# Altium PCB tara_aghaei.PcbDoc
Units mm, origin at the board's own origin, x right, y up, seen from the top; angles counter-clockwise.
Board outline 101.05 x 73 mm, 2 copper layers (Top Layer, Bottom Layer); 28 components, 23 nets, 119 pads, 13 vias.
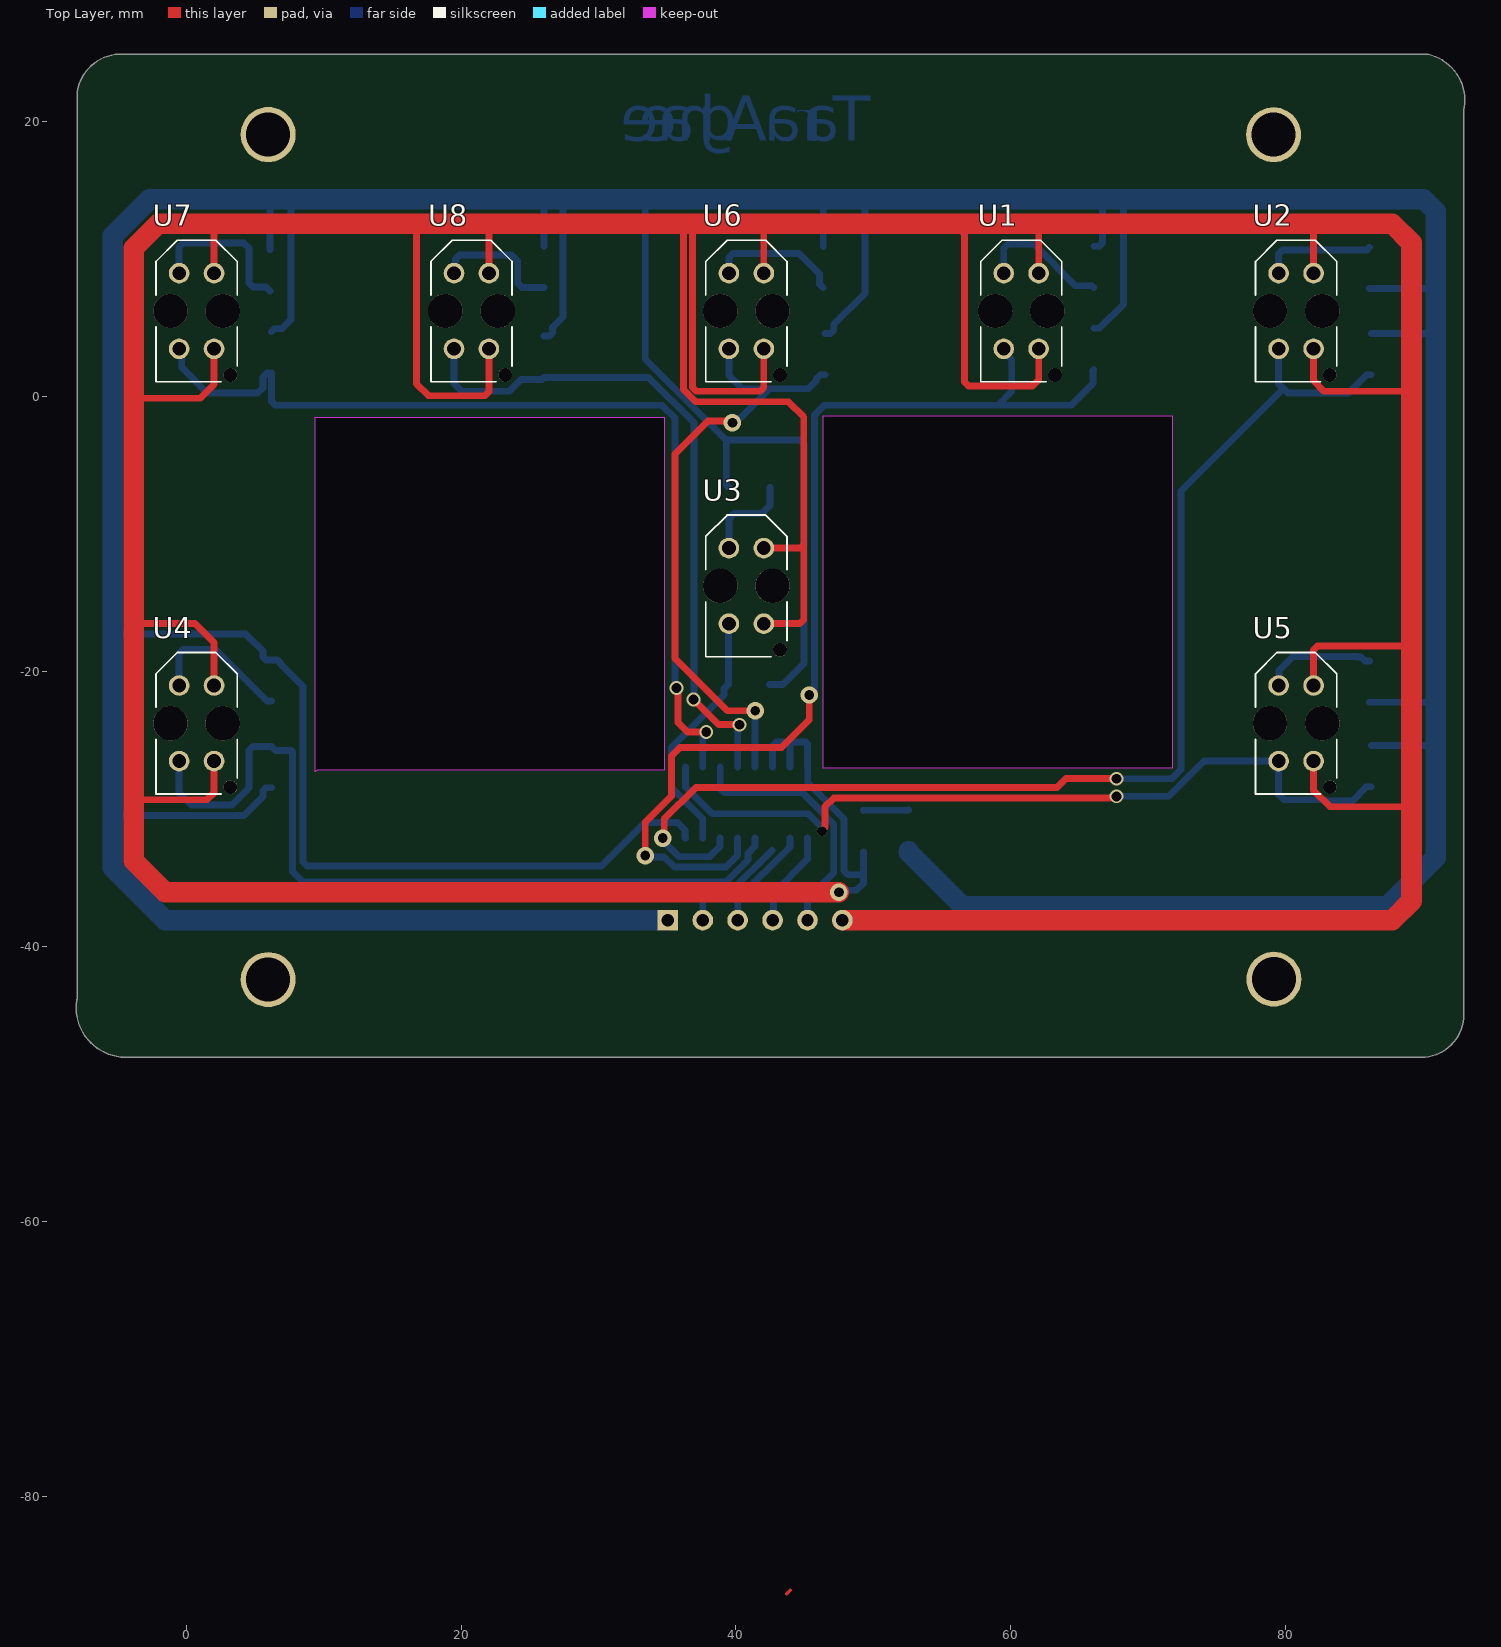
[diagram p0: Top Layer view]
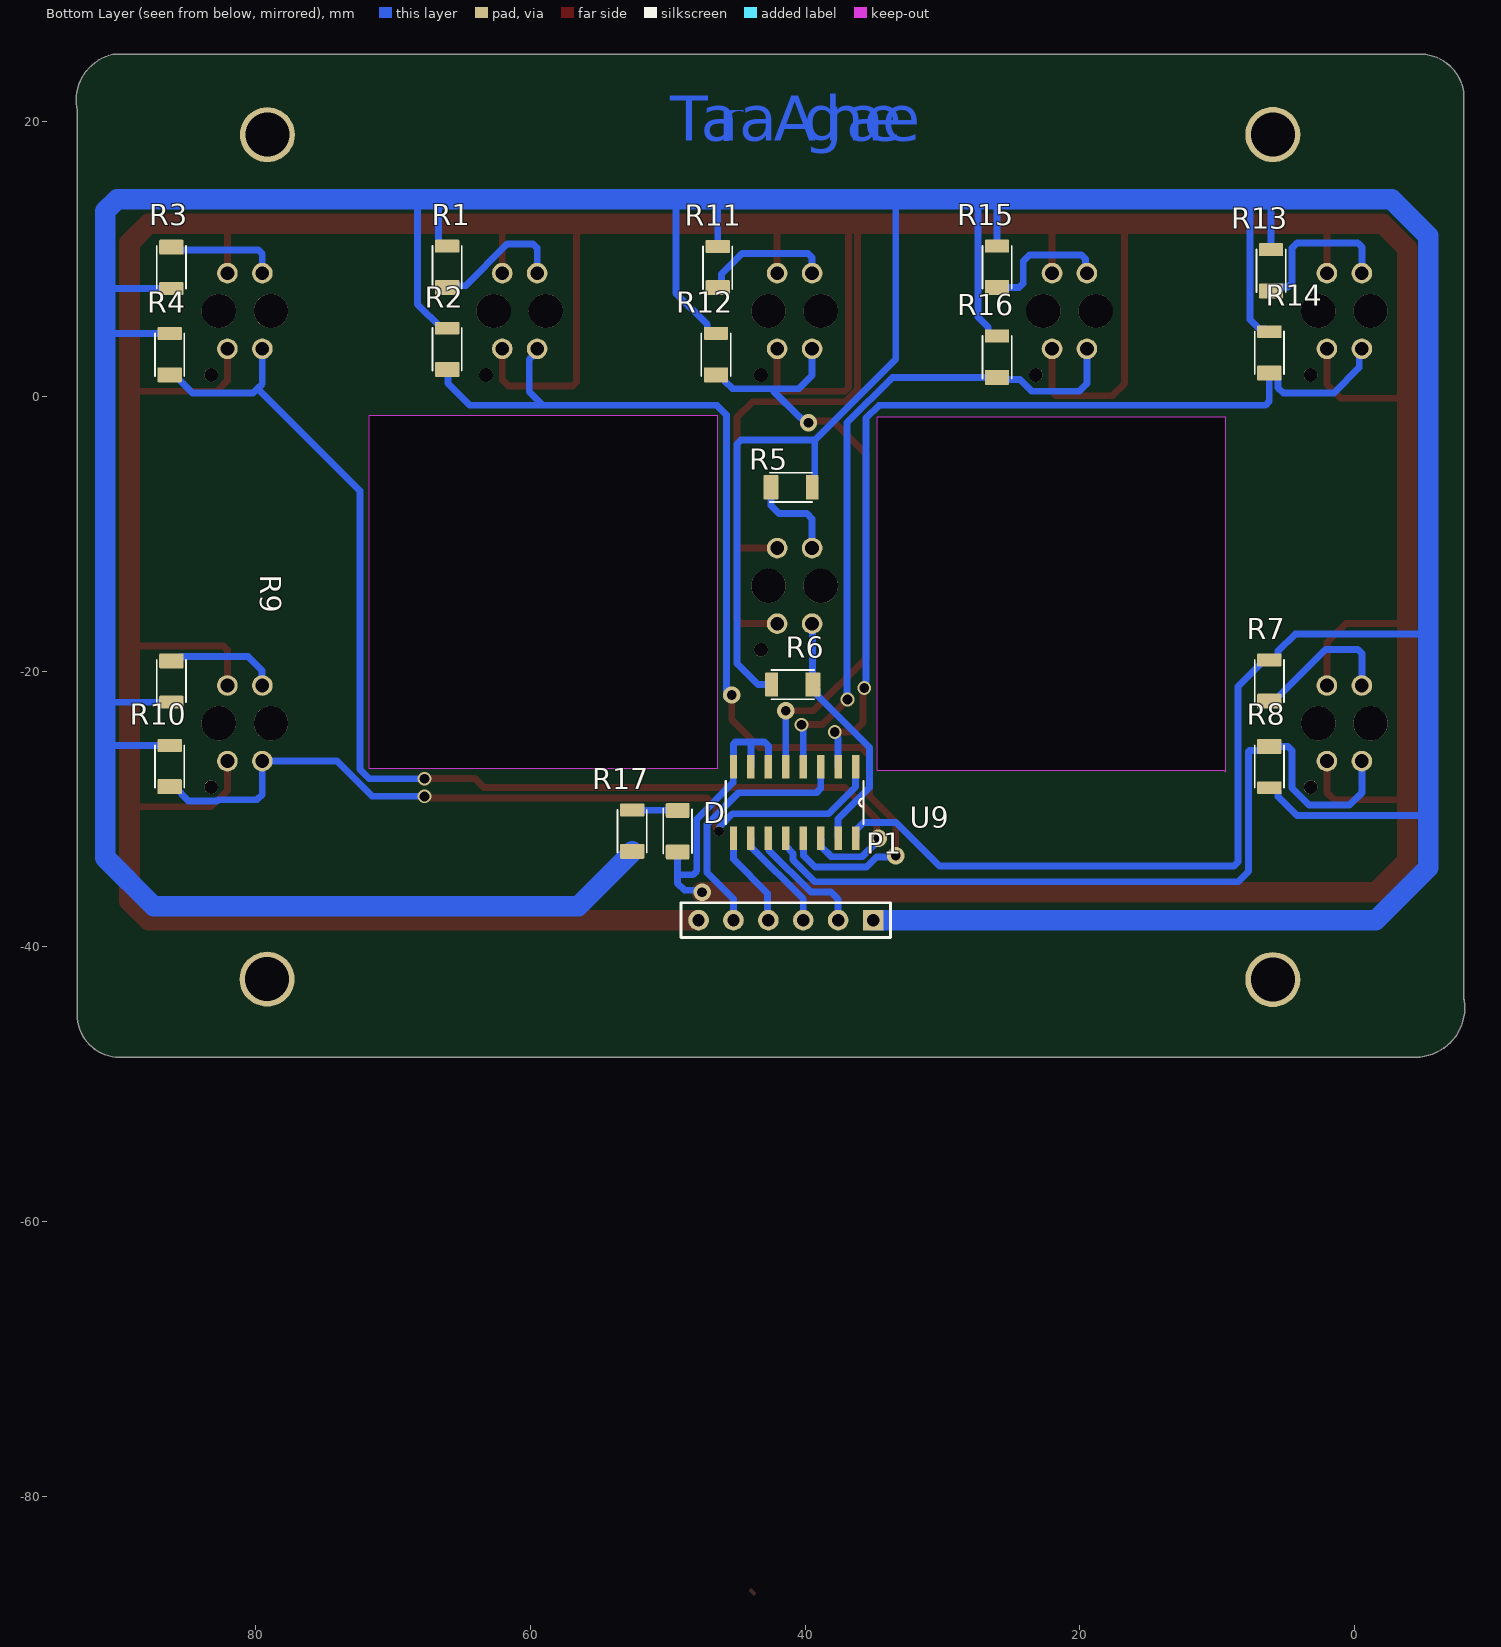
[diagram p1: Bottom Layer view, seen from below]
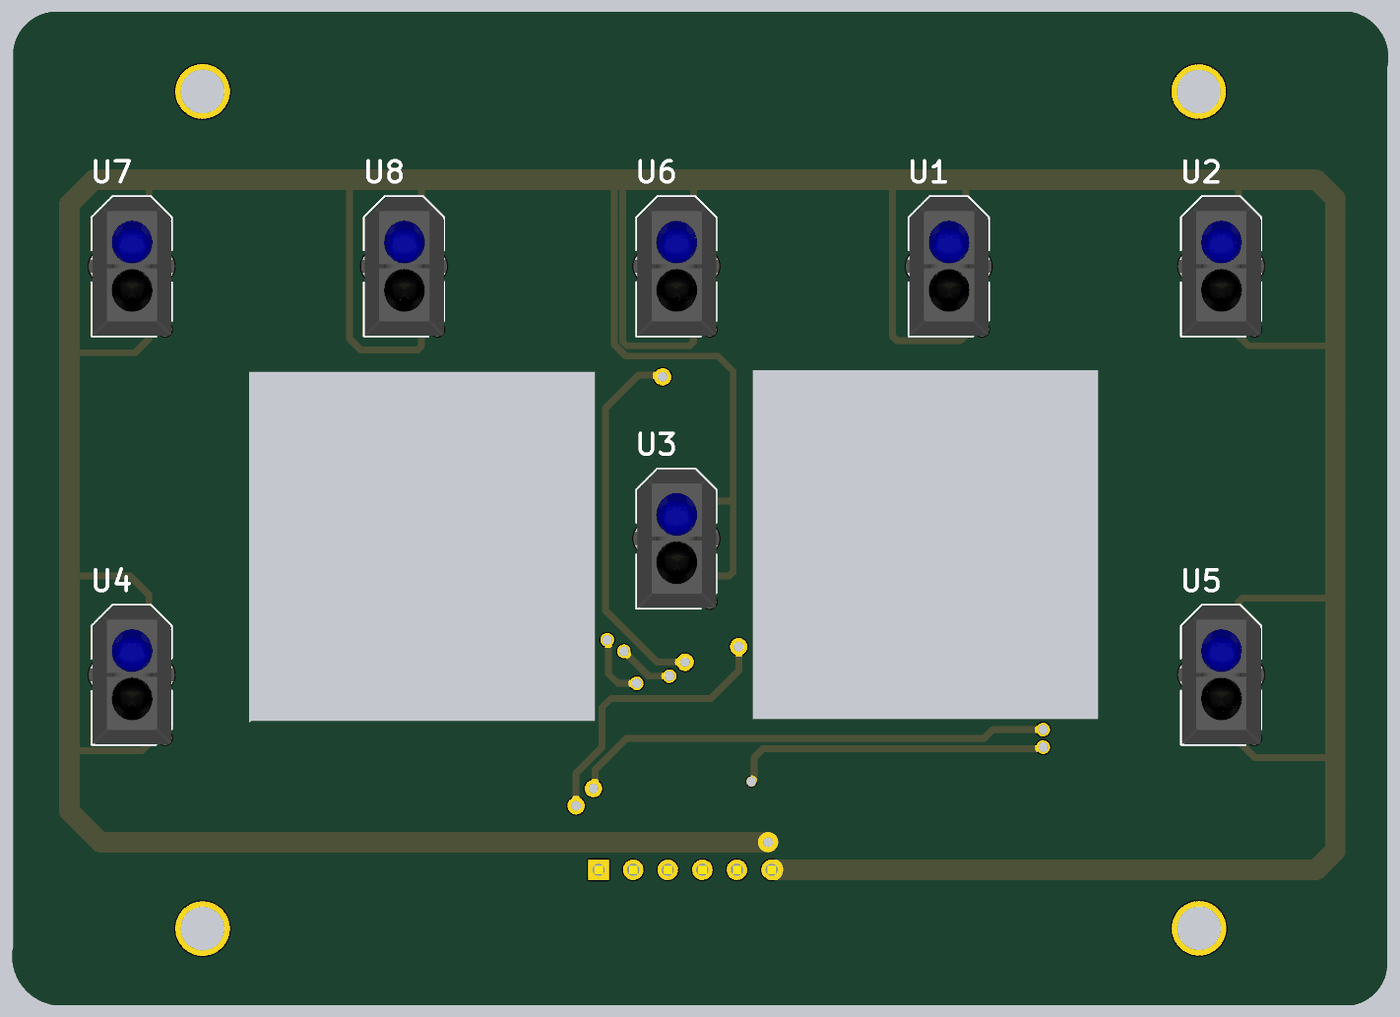
[diagram p2: 3D render of the assembled board from above, using the file's embedded part models]
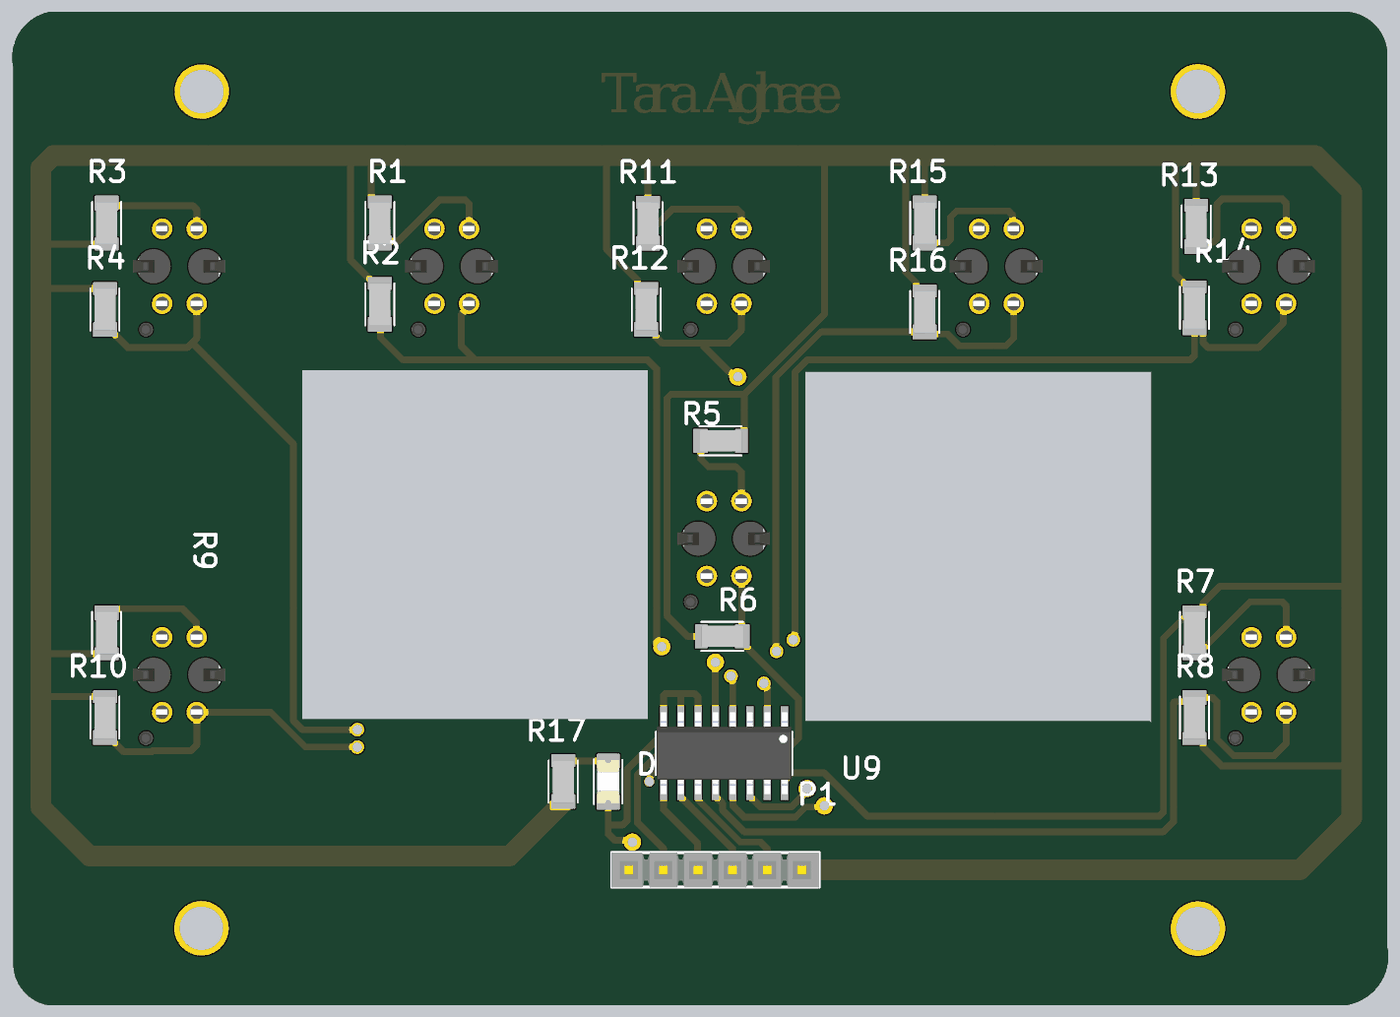
[diagram p3: 3D render of the assembled board from below, using the file's embedded part models]

## Layer stack, top to bottom
Top Solder: solder mask 0.0102, Solder Resist, Dk 3.5
Top Layer: signal copper 0.0356
Dielectric 1: dielectric 0.32, FR-4, Dk 4.8
Bottom Layer: signal copper 0.0356
Bottom Solder: solder mask 0.0102, Solder Resist, Dk 3.5

## Board outline
-4.757,-48.057 cw(c-4.37,-44.438) -7.974,-43.927 cw(c-7.848,-43.945) -7.923,-43.842 -7.923,7.541 -7.923,22.108 cw(c-7.795,22.108) -7.922,22.125 cw(c-4.727,21.696) -4.307,24.891 90.342,24.891 cw(c90.342,24.764) 90.369,24.888 cw(c89.632,21.559) 93.042,21.559 cw(c89.633,21.559) 92.964,20.836 92.964,6.805 92.964,-44.957 cw(c89.85,-44.973) 92.964,-44.973 cw(c89.849,-44.973) 89.865,-48.088 cw(c89.865,-47.565) 89.865,-48.088 -4.628,-48.088 cw(c-4.628,-47.961) -4.715,-48.054 cw(c-4.744,-47.93)
cut-out: 46.355,-1.397 71.755,-1.397 71.755,-27.051 46.355,-27.051
cut-out: 9.398,-1.524 34.798,-1.524 34.798,-27.178 9.525,-27.178 9.398,-27.305

## Design rules (kind name [scope] priority, off if disabled: settings)
Clearance [All] p1: gap=0.254 ignorepadtopadclearanceinfootprint=FALSE except(0: Arc-Hole Track-Hole SMDPad-Hole THPad-Hole Via-Hole Fill-Hole Poly-Hole Region-Hole Text-Hole)
PolygonConnect [All] p1: connectstyle=Relief reliefconductorwidth=0.254 reliefentries=4 polygonreliefangle="90 Angle" airgapwidth=0.254
RoutingVias [All] p1: holewidth=0.711 width=1.27 viastyle="Through Hole" minholewidth=0.711 minwidth=1.27 maxholewidth=0.711 maxwidth=1.27
SolderMaskExpansion [All] p1: expansion=0.102
Width [All] p1: maxlimit=2 minlimit=0.5 preferedwidth=1 minimp=50.000000 maximp=50.000000 favimp=50.000000
30 further rules are at their usual default settings.

## Components (designator, comment, footprint, x,y, rotation, side; value= is the part's Value field where it differs from the comment)
D "LTST-C230KFKT" LEDC3216X110 49.276,-31.623 r270 bottom
P1 "Header 6" HDR1X6 35.052,-38.1 r0 bottom
R1 "4-1879462-2" RESC3115X65N 66.04,9.398 r90 bottom
R2 "4-1879462-2" RESC3115X65N 66.04,3.429 r90 bottom
R3 "4-1879462-2" RESC3115X65N 86.106,9.398 r270 bottom
R4 "4-1879462-2" RESC3115X65N 86.233,3.048 r90 bottom
R5 "4-1879462-2" RESC3115X65N 41.021,-6.604 r180 bottom
R6 "4-1879462-2" RESC3115X65N 40.894,-20.955 r0 bottom
R7 "4-1879462-2" RESC3115X65N 6.223,-20.701 r90 bottom
R8 "4-1879462-2" RESC3115X65N 6.223,-26.924 r270 bottom
R9 "4-1879462-2" RESC3115X65N 86.106,-20.701 r270 bottom
R10 "4-1879462-2" RESC3115X65N 86.233,-26.924 r90 bottom
R11 "4-1879462-2" RESC3115X65N 46.355,9.382 r90 bottom
R12 "4-1879462-2" RESC3115X65N 46.482,3.048 r90 bottom
R13 "4-1879462-2" RESC3115X65N 6.096,9.144 r90 bottom
R14 "4-1879462-2" RESC3115X65N 6.223,3.175 r90 bottom
R15 "4-1879462-2" RESC3115X65N 26.035,9.398 r90 bottom
R16 "4-1879462-2" RESC3115X65N 26.035,2.862 r90 bottom
R17 "4-1879462-2" RESC3115X65N 52.578,-31.623 r90 bottom
U1 "TCRT5000" OPTO_TCRT5000 60.762,6.223 r90 top
U2 "TCRT5000" OPTO_TCRT5000 80.762,6.223 r90 top
U3 "TCRT5000" OPTO_TCRT5000 40.762,-13.777 r90 top
U4 "TCRT5000" OPTO_TCRT5000 0.762,-23.777 r90 top
U5 "TCRT5000" OPTO_TCRT5000 80.762,-23.777 r90 top
U6 "TCRT5000" OPTO_TCRT5000 40.762,6.223 r90 top
U7 "TCRT5000" OPTO_TCRT5000 0.762,6.223 r90 top
U8 "TCRT5000" OPTO_TCRT5000 20.762,6.223 r90 top
U9 "74HC4051D" SOIC127P600X175-16N 40.767,-29.54 r270 bottom

## Footprints (in the part's own frame and the unit in brackets; to place one, negate y for a bottom-side part, rotate by r counter-clockwise, add the part's x,y. Pads: shape width x height; smd on the part's side, far side on the other; paste and mask are expansions set on the pad)
HDR1X6 [mm] "Connector; Header; 6 Position"
  rect 1.5x1.5 hole 0.9: 1(0,0)
  round 1.5 hole 0.9: 2(2.54,0) 3(5.08,0) 4(7.62,0) 5(10.16,0) 6(12.7,0)
  silkscreen extent -1.27,-1.27 13.97,1.27, body extent -1.26,-1.25 13.98,1.29, height 8.38
LEDC3216X110 [mm]
  rrect20% 1.1x1.73 smd: A(1.51,0) C(-1.51,0)
  silkscreen extent -1.65,-1.04 1.65,1.04, body extent -1.6,-0.8 1.6,0.8, height 1.1
OPTO_TCRT5000 [mm]
  round 1.5 hole 1: A(2.75,1.27) CATH(2.75,-1.27) COLL(-2.75,1.27) E(-2.75,-1.27)
  round 1 hole 1 unplated: ""(-4.65,-2.45)
  round 2.5 hole 2.5 unplated: ""(0,1.9) ""(0,-1.9)
  silkscreen extent -5.15,-2.95 5.15,2.95, body extent -5.1,-3.43 5.1,3.37, height 7.2
RESC3115X65N [mm]
  rrect14% 1.09x1.77 smd: 1(-1.465,0)
  rrect14% 0.94x1.77 smd: 2(1.54,0)
  silkscreen extent -1.55,-1.06 1.55,1.06, body extent -1.55,-0.77 1.55,0.77, height 0.53
SOIC127P600X175-16N [mil]
  rect 67x21 smd: 1(-102,175) 2(-102,125) 3(-102,75) 4(-102,25) 5(-102,-25) 6(-102,-75) 7(-102,-125) 8(-102,-175) 9(102,-175) 10(102,-125) 11(102,-75) 12(102,-25) 13(102,25) 14(102,75) 15(102,125) 16(102,175)
  silkscreen extent -62,-197 62,197, body extent -118,-195 118,195, height 69

## Part data
D: "Orange 605nm LED Indication - Discrete 2V 1206 (3216 Metric)", Package="1206 Lite-On", Availability=Unavailable, MF="Lite-On Inc.", MP=LTST-C230KFKT, Price=None, SnapEDA_Link=https://www.snapeda.com/parts/LTST-C230KFKT/Lite-On%20Inc./view-part/353318/?ref=snap
P1: "Header, 6-Pin", LatestRevisionDate=17-Jul-2002, LatestRevisionNote="Re-released for DXP Platform.", Publisher="Altium Limited"
R1 R2 R3 R4 R5 R6 R7 R8 R9 R10 R11 R12 R13 R14 R15 R16 R17: "RES 0.82 OHM 1% 1/4W 1206", Package=1206, Power_Rating=".25 W", Resistance=82, Tolerance=1%, Availability="In Stock", Check_prices=https://www.snapeda.com/parts/4-1879462-2/TE+Connectivity/view-part/?ref=eda, EU_RoHS_Compliance="Compliant with Exemptions", MF="TE Connectivity", MP=4-1879462-2, Price=None, SnapEDA_Link=https://www.snapeda.com/parts/4-1879462-2/TE+Connectivity/view-part/?ref=snap
U1 U2 U3 U4 U5 U6 U7 U8: "950 nm 60 mA Through Hole Reflective Optical Sensor with Transistor Output", Package=None, Availability=Unavailable, MP=TCRT5000, Price=None
U9: "1 Circuit IC Switch 8:1 130Ohm 16-SOIC", Package="SOIC-16 Toshiba", Availability="In Stock", Check_prices=https://www.snapeda.com/parts/74HC4051D/Toshiba/view-part/?ref=eda, MF=Toshiba, MP=74HC4051D, Price=None, Purchase-URL=https://pricing.snapeda.com/search/part/74HC4051D/?ref=eda, SnapEDA_Link=https://www.snapeda.com/parts/74HC4051D/Toshiba/view-part/?ref=snap

## Free pads (board coordinates)
  round 4 hole 3.2: ""(5.969,-42.418) ""(5.969,19.05) ""(5.971,19.067) ""(79.121,19.05) ""(79.144,-42.394)

## Via types
v1: diameter 1, hole 0.711, Top Layer to Bottom Layer, 6 vias
v2: diameter 1.27, hole 0.711, Top Layer to Bottom Layer, 6 vias
v3: diameter 0.711, hole 0.711, Top Layer to Bottom Layer, 1 vias

## Nets (pads, with @x,y where several pads share a name; then routed paths per layer and width w, separated by ;. In a path a pad name is that pad's centre, name@x,y a point inside that pad or via, vN(x,y) a via of type N, cw(c..) or ccw(c..) an arc to the next point about the centre after c; other vN are vias at no path point)
5: P1.1 R1.2 R2.2 R3.2 R4.2 R5.2 R6.2 R7.2 R8.2 R9.2 R10.2 R11.2 R12.2 R13.2 R14.2 R15.2 R16.2 R17.1 U9.16 | length 470.9
  Bottom Layer w0.5: -5.334,-30.48 4.207,-30.48 5.588,-29.099 5.588,-28.684 5.808,-28.464 R8.2 ; -5.334,-17.272 4.334,-17.272 5.588,-18.526 5.588,-18.941 5.808,-19.161 R7.2 6.638,-19.161 6.858,-19.381 6.858,-19.447 8.501,-21.09 8.501,-33.878 8.794,-34.171 30.218,-34.171 33.401,-30.988 35.763,-30.988 36.305,-31.53 36.305,-32.114 U9.16 ; R13.2 6.096,13.97 6.477,14.351 ; R14.2 6.443,4.935 6.967,4.935 7.62,5.588 7.62,14.351 ; R16.2 26.45,4.402 26.67,4.622 26.67,5.037 27.432,5.799 27.432,14.351 ; R15.2 26.035,14.224 26.162,14.351 ; 33.401,14.351 33.401,2.718 39.294,-3.175 ; R5.2 39.294,-6.417 39.294,-3.175 ; R6.2 43.434,-20.955 44.958,-19.431 44.958,-3.468 44.665,-3.175 39.294,-3.175 ; R11.2 46.355,14.224 46.482,14.351 ; R12.2 46.897,4.588 47.117,4.808 47.117,5.223 49.403,7.509 49.403,14.351 ; R2.2 66.455,4.969 68.199,6.713 68.199,14.351 ; R1.2 66.455,10.938 66.675,11.158 66.675,13.97 66.294,14.351 ; R9.2 90.567,-22.241 90.932,-22.606 ; R3.2 90.789,7.858 90.932,8.001 ; R10.2 90.916,-25.384 90.932,-25.4 ; R4.2 90.313,4.588 ; 90.678,-19.05 90.932,-19.304 ; 90.789,4.588 90.932,4.445 ; 90.916,-28.464 90.932,-28.448 ; 90.916,1.508 90.932,1.524 ; 90.916,10.938 90.932,10.922
  Bottom Layer w1.5: P1.1 -1.524,-38.1 -5.334,-34.29 -5.334,-30.48 -5.334,-17.272 -5.334,11.684 -2.667,14.351 6.477,14.351 7.62,14.351 26.162,14.351 27.432,14.351 33.401,14.351 46.482,14.351 49.403,14.351 66.294,14.351 68.199,14.351 90.053,14.351 90.932,13.472 90.932,10.922 90.932,8.001 90.932,4.445 90.932,1.524 90.932,-19.304 90.932,-22.606 90.932,-25.4 90.932,-28.448 90.932,-33.538 87.384,-37.086 56.506,-37.086 52.578,-33.158 R17.1
GND: D.A P1.6 U1.CATH U1.E U2.CATH U2.E U3.CATH U3.E U4.CATH U4.E U5.CATH U5.E U6.CATH U6.E U7.CATH U7.E U8.CATH U8.E U9.6 U9.7 U9.8 | length 481
  Top Layer w0.5: -3.81,-29.337 1.524,-29.337 2.032,-28.829 U4.E ; -3.81,-16.51 0.635,-16.51 2.032,-17.907 U4.CATH ; -3.81,-0.127 1.016,-0.127 2.032,0.889 U7.E ; U7.CATH 2.032,12.319 2.286,12.573 ; 16.764,12.573 16.764,0.928 17.631,0.061 21.739,0.061 22.032,0.354 U8.E ; U8.CATH 22.032,12.507 22.098,12.573 ; 36.195,12.573 36.195,0.508 37.084,-0.381 43.815,-0.381 44.941,-1.507 44.941,-10.773 ; 36.83,12.573 36.83,0.674 37.123,0.381 41.739,0.381 42.032,0.674 U6.E ; U3.E 44.648,-16.527 44.941,-16.234 44.941,-10.773 ; U3.CATH 44.687,-11.027 44.941,-10.773 ; U6.CATH 42.032,12.314 42.291,12.573 ; 55.88,12.573 56.642,11.811 56.642,1.055 56.935,0.762 61.595,0.762 62.032,1.199 U1.E ; U1.CATH 62.032,12.248 62.357,12.573 ; 68.199,12.573 68.326,12.446 ; U5.E 82.032,-28.667 83.21,-29.845 89.154,-29.845 ; U5.CATH 82.032,-18.444 82.325,-18.151 89.154,-18.151 ; U2.E 82.032,1.153 82.804,0.381 89.154,0.381 ; U2.CATH 82.032,12.436 82.169,12.573 ; 89.027,-23.749 89.154,-23.622
  Top Layer w1.5: v2(47.498,-36.068) -1.524,-36.068 -3.81,-33.782 -3.81,-29.337 -3.81,-16.51 -3.81,-0.127 -3.81,10.795 -2.032,12.573 2.286,12.573 16.764,12.573 22.098,12.573 36.195,12.573 42.291,12.573 55.88,12.573 62.357,12.573 68.199,12.573 82.169,12.573 87.757,12.573 89.154,11.176 89.154,0.381 89.154,-18.151 89.154,-23.622 89.154,-29.845 89.154,-36.703 87.757,-38.1 P1.6
  Bottom Layer w0.5: U9.6 42.672,-25.439 42.965,-25.146 44.025,-25.146 ; U9.7 43.942,-25.229 44.025,-25.146 ; v2(47.498,-36.068) 47.645,-35.921 48.788,-35.921 49.276,-35.433 49.276,-34.798 ; D.A 49.276,-34.798 ; 44.025,-25.146 45.085,-25.146 45.212,-25.273 U9.8 45.229,-26.966 45.229,-28.084 47.879,-30.734 47.879,-34.505 48.172,-34.798 49.276,-34.798
NetD_C: D.C R17.2 | length 3.3
  Bottom Layer w0.5: D.C 49.291,-30.098 52.563,-30.098 R17.2
NetR1_1: R1.1 U1.A | length 9.8
  Bottom Layer w0.5: U1.A 59.492,10.812 59.785,11.105 61.673,11.105 64.72,8.059 65.914,8.059 R1.1
NetR3_1: R3.1 U2.A | length 8.2
  Bottom Layer w0.5: U2.A 79.492,10.375 79.785,10.668 85.911,10.668 R3.1
NetR5_1: R5.1 U3.A | length 6.9
  Bottom Layer w0.5: U3.A 39.492,-8.895 39.878,-8.509 41.91,-8.509 42.473,-7.946 42.473,-6.617 R5.1
NetR7_1: R7.1 U4.A | length 10.7
  Bottom Layer w0.5: U4.A -0.508,-18.708 -0.215,-18.415 2.142,-18.415 5.588,-21.861 5.588,-21.871 5.883,-22.166 R7.1
NetR9_1: R9.1 U5.A | length 8.2
  Bottom Layer w0.5: U5.A 79.514,-21.005 79.514,-19.927 80.518,-18.923 85.178,-18.923 85.196,-18.941 85.471,-18.941 85.766,-19.236 R9.1
NetR11_1: R11.1 U6.A | length 9.6
  Bottom Layer w0.5: U6.A 39.492,10.121 39.785,10.414 44.577,10.414 46.072,8.919 46.072,8.2 R11.1
NetR13_1: R13.1 U7.A | length 11.6
  Bottom Layer w0.5: U7.A -0.508,10.883 -0.215,11.176 4.191,11.176 4.572,10.795 4.572,8.267 4.865,7.974 5.801,7.974 R13.1
NetR15_1: R15.1 U8.A | length 9.5
  Bottom Layer w0.5: U8.A 19.592,9.073 19.592,9.994 19.885,10.287 23.681,10.287 24.13,9.838 24.13,8.226 24.423,7.933 R15.1
out: P1.5 U9.3 | length 18.7
  Bottom Layer w0.5: U9.3 38.862,-28.536 39.155,-28.829 44.831,-28.829 47.125,-31.123 47.125,-34.639 45.212,-36.552 P1.5
s0: P1.2 U9.11 | length 8
  Bottom Layer w0.5: P1.2 37.592,-36.576 38.108,-36.06 39.582,-36.06 42.621,-33.02
s1: P1.3 U9.10 | length 7.8
  Bottom Layer w0.5: P1.3@40.323,-37.909 P1.3 40.132,-37.909 40.132,-36.576 43.925,-32.783 43.925,-32.148 U9.10
s2: P1.4 U9.9 | length 7
  Bottom Layer w0.5: P1.4 42.725,-38.047 42.725,-36.142 45.212,-33.655 U9.9
Y0: R2.1 U1.COLL U9.13 | length 77.3
  Top Layer w0.5: v2(33.401,-33.401) 33.401,-30.988 35.306,-29.083 35.306,-26.162 35.941,-25.527 43.307,-25.527 45.339,-23.495 v2(45.339,-21.717)
  Bottom Layer w0.5: v2(33.401,-33.401) 33.492,-33.492 34.786,-33.492 35.465,-34.171 35.534,-34.24 39.269,-34.24 40.115,-33.394 40.115,-32.148 U9.13 ; v2@45.593,-21.971 45.712,-21.852 45.712,-1.327 46.404,-0.635 59.055,-0.635 ; U1.COLL 59.492,3.259 60.071,2.68 60.071,0.381 59.055,-0.635 ; R2.1 65.986,1.91 65.986,0.962 64.389,-0.635 59.055,-0.635
Y1: R4.1 U2.COLL U9.14 | length 87.2
  Top Layer w0.5: v2(34.671,-32.131) 34.786,-32.016 34.786,-30.746 37.084,-28.448 63.373,-28.448 64.016,-27.805 v1(67.691,-27.805)
  Bottom Layer w0.5: v2(34.671,-32.131) 34.671,-32.31 35.847,-33.486 38.091,-33.486 38.845,-32.732 38.845,-32.148 U9.14 ; v1(67.691,-27.805) 67.699,-27.813 71.706,-27.813 72.39,-27.129 72.39,-6.858 79.834,0.586 ; U2.COLL 79.492,0.928 79.834,0.586 ; R4.1 85.893,1.583 84.564,0.254 80.166,0.254 79.834,0.586
Y2: R6.1 U3.COLL U9.15 | length 18.3
  Bottom Layer w0.5: U9.15 37.592,-30.734 35.306,-28.448 35.306,-25.527 39.134,-21.699 39.134,-21.25 R6.1 ; R6.1@39.461,-20.955 39.461,-16.558 U3.COLL
Y3: R8.1 U4.COLL U9.12 | length 59.1
  Bottom Layer w0.5: U4.COLL -0.508,-28.829 0.381,-29.718 3.341,-29.718 4.572,-28.487 4.572,-25.752 4.865,-25.459 R8.1 6.518,-25.754 7.681,-25.754 7.747,-25.82 7.747,-34.544 8.509,-35.306 39.269,-35.306 40.869,-33.706 40.869,-33.248 41.402,-32.715 U9.12
Y4: R10.1 U5.COLL U9.1 | length 58.9
  Top Layer w0.5: v3(46.265,-31.623) 46.265,-31.566 46.482,-31.349 46.482,-29.845 47.125,-29.202 67.235,-29.202 67.25,-29.188 67.603,-29.188 v1(67.699,-29.092)
  Bottom Layer w0.5: U9.1 36.322,-28.398 38.277,-30.353 45.264,-30.353 46.225,-31.314 46.225,-31.583 v3(46.265,-31.623) ; v1(67.699,-29.092) 67.708,-29.083 71.501,-29.083 71.509,-29.075 ; 71.51,-29.075 74.058,-26.527 U5.COLL 79.492,-28.946 79.883,-29.337 82.702,-29.337 82.796,-29.431 84.851,-29.431 85.893,-28.389 R10.1
Y5: R12.1 U6.COLL U9.5 | length 45.1
  Top Layer w0.5: v2(39.751,-1.901) 39.628,-1.778 37.973,-1.778 35.56,-4.191 35.56,-19.05 39.37,-22.86 v2(41.402,-22.86)
  Bottom Layer w0.5: U6.COLL 39.492,1.529 40.452,0.569 42.28,0.569 ; v2(39.751,-1.901) 39.959,-1.901 40.371,-1.489 40.421,-1.489 42.28,0.37 42.28,0.569 ; U9.5 v2(41.402,-22.86) ; R12.1 46.142,1.583 45.847,1.288 45.847,1.134 45.282,0.569 42.28,0.569
Y6: R14.1 U7.COLL U9.2 | length 68.5
  Top Layer w0.5: v1(35.687,-21.209) 35.783,-21.305 35.783,-23.718 36.333,-24.268 36.346,-24.268 36.484,-24.407 v1(37.846,-24.407)
  Bottom Layer w0.5: U7.COLL -0.317,3.282 -0.317,2.095 1.524,0.254 5.207,0.254 5.588,0.635 5.588,1.415 5.883,1.71 R14.1@5.981,1.71 ; R14.1 6.223,-0.342 6.516,-0.635 34.622,-0.635 35.56,-1.573 35.56,-20.728 35.591,-20.76 35.591,-20.986 v1@35.56,-21.018 ; U9.2 37.592,-24.796 37.846,-24.542 v1(37.846,-24.407)
Y7: R16.1 U8.COLL U9.4 | length 49.4
  Top Layer w0.5: v1(36.912,-22.053) 38.735,-23.876 v1(40.259,-23.876)
  Bottom Layer w0.5: U8.COLL 19.492,0.955 20.066,0.381 23.495,0.381 24.36,1.246 25.884,1.246 R16.1 33.656,1.397 36.957,-1.904 36.957,-22.007 v1(36.912,-22.053) ; U9.4 40.132,-24.138 40.259,-24.011 v1(40.259,-23.876)
pads on no net: U1. U2. U3. U4. U5. U6. U7. U8.
copper on no net: | length 0.4
  Top Layer w0.254: 43.693,-87.122 43.947,-86.868

## Other copper
Bottom Layer:
  text "e" at 34.386,17.526 h5.66
  text "e" at 35.739,17.526 h5.66
  text "a" at 37.007,17.526 h5.66
  text "h" at 38.571,17.526 h5.66
  text "g" at 40.093,17.526 h5.66
  text "A" at 42.291,17.526 h5.66
  text "a" at 44.785,17.526 h5.66
  text "r" at 46.307,17.526 h5.66
  text "a" at 47.575,17.526 h5.66
  text "T" at 49.816,17.526 h5.66

## Silkscreen, mask and mechanical layers (free items; w line width, h text height)
Mechanical 1:
  circle w0.254: c79.12,-42.418 r1.65
  circle w0.254: c6,-42.418 r1.65
  circle w0.254: c6,19.05 r1.65
  circle w0.254: c79.121,19.05 r1.65
  lines w0.254: -7.848,-43.945 ccw(c-4.37,-44.438) -4.744,-47.93 ; -7.795,-43.942 -7.795,7.541 -7.795,22.108 cw(c-4.727,21.696) -4.315,24.764 19.349,24.764 66.678,24.764 90.342,24.764 cw(c89.632,21.559) 92.837,20.85 92.837,15.875 92.837,6.805 92.837,-44.958 cw(c89.849,-44.973) 89.865,-47.961 -4.628,-47.961 ; 9.461,-27.241 34.861,-27.241 34.861,-1.587 9.461,-1.587 9.461,-27.241 ; 46.355,-27.051 71.755,-27.051 71.755,-1.397 46.355,-1.397 46.355,-27.051